# Altium PCB 屏幕.pcbdoc
Units mil, origin at the board's own origin, x right, y up, seen from the top; angles counter-clockwise.
Board outline 3286 x 2666.29 mil, 2 copper layers (Top Layer, Bottom Layer); 25 components, 28 nets, 116 pads, 38 vias.
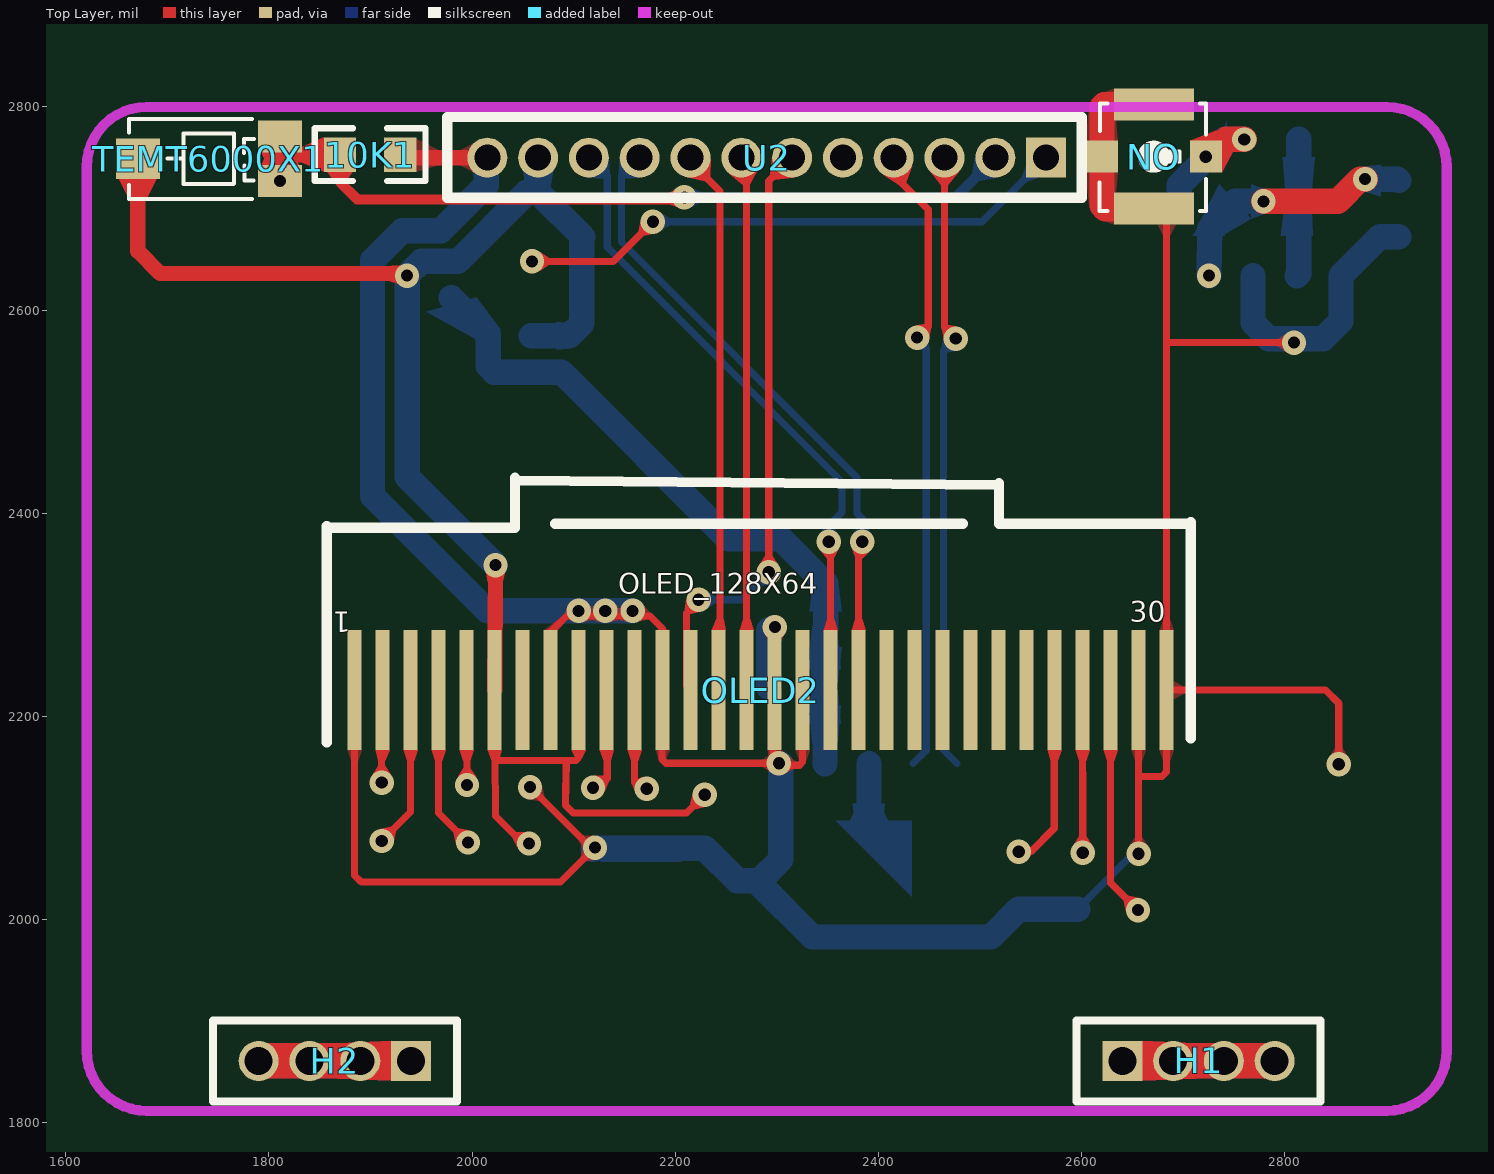
[diagram p0: Top Layer view]
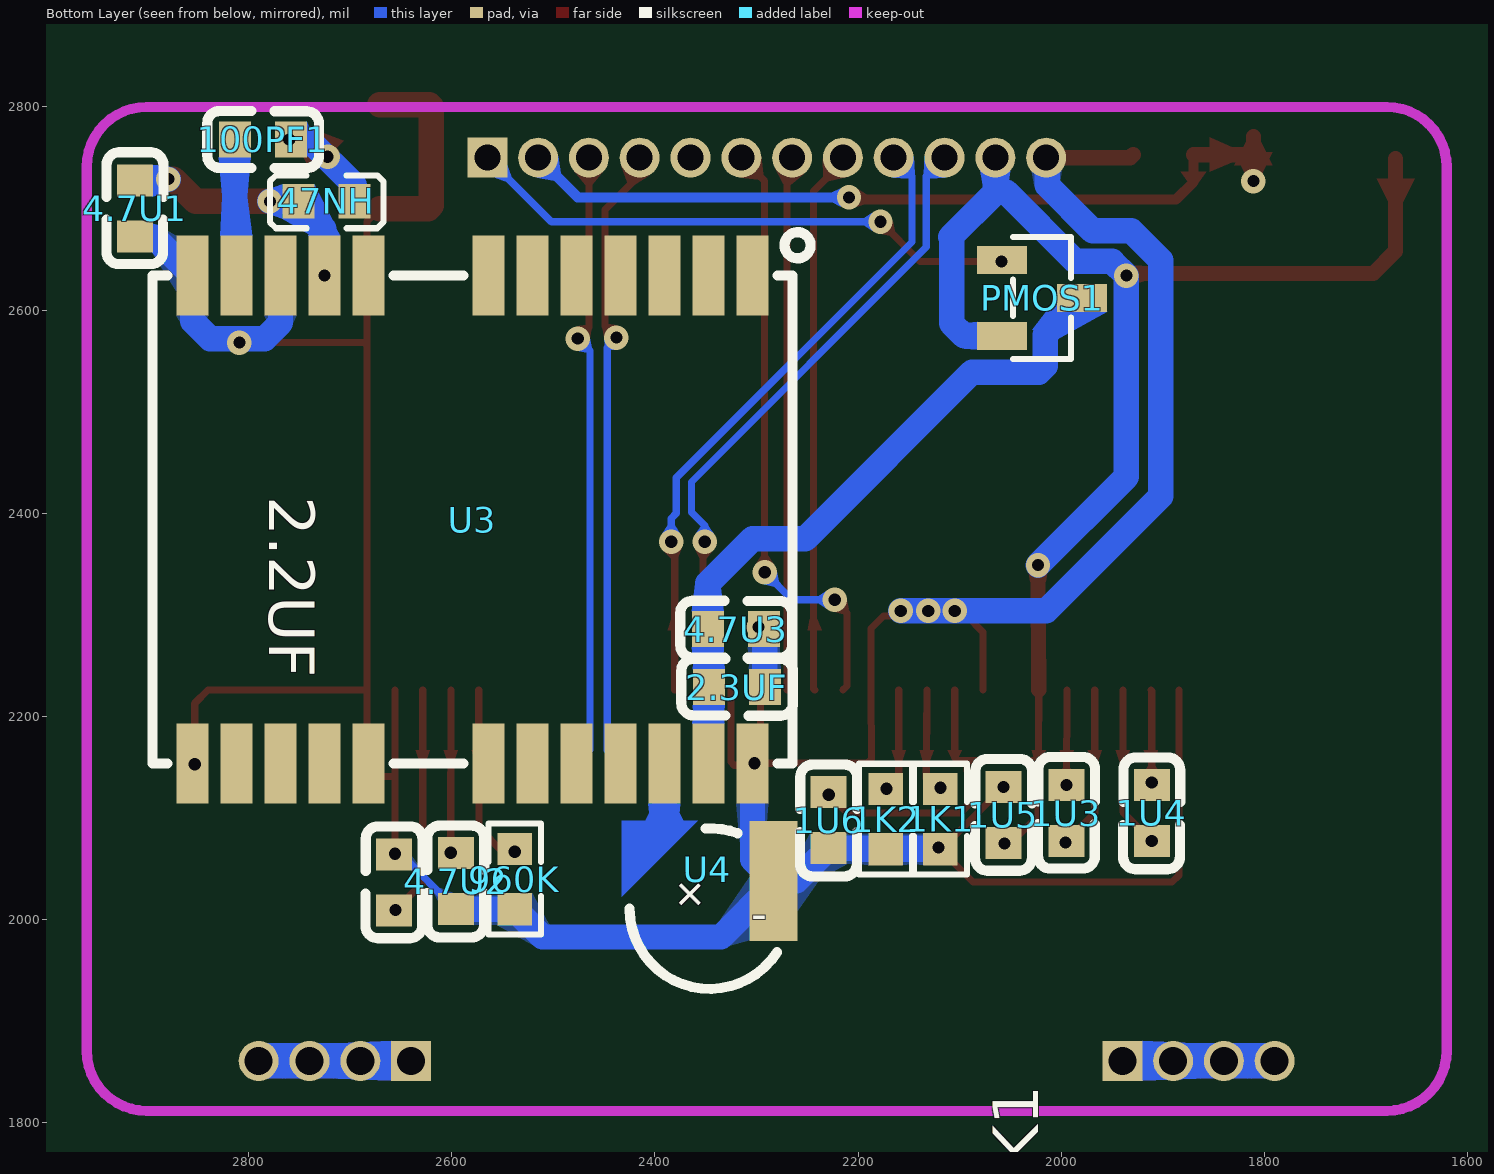
[diagram p1: Bottom Layer view, seen from below]

## Layer stack, top to bottom
Top Layer: signal copper (thickness not stored)
Dielectric: dielectric 12.6, FR-4, Dk 4.8
Bottom Layer: signal copper (thickness not stored)

## Board outline
4286,1000 1000,1000 1000,3666.29 4286,3666.29

## Components (designator, comment, footprint, x,y, rotation, side; value= is the part's Value field where it differs from the comment)
1K1 "1k" R0603#1 2119,2098.94 r270 bottom
1K2 "1k" R0603#1 2173,2098.94 r270 bottom
1U3 "1U" C0603 1995,2104.94 r90 bottom
1U4 "1u" C0603 1911,2104.94 r270 bottom
1U5 "1u" C0603 2057,2102.94 r90 bottom
1U6 "1U" C0603 2229,2097.94 r270 bottom
2.2UF "0.1u" C0603 2657,2036.5 r90 bottom
2.3UF "0.1u" C0603 2319.44,2228.94 r180 bottom
4.7U1 "0.1u" C0603 2912,2699.94 r90 bottom
4.7U2 "0.1u" C0603 2596,2037.94 r270 bottom
4.7U3 "0.1u" C0603 2320.44,2285.94 r180 bottom
10K1 "10K1" R0603#2 1899.66,2752.94 r180 top
47NH "1m" L0603 2723.45,2706.94 r180 bottom
100PF1 "100PF1" C0603 2786,2767.94 r180 bottom
960K "1k" R0603#1 2538,2039.94 r270 bottom
H1 "1.27mm1*4P" 1.27MM1*4P 2715,1860.94 r0 top
H2 "1.27mm1*4P" 1.27MM1*4P 1865,1860.94 r180 top
NO "IPEX-20279-001E" IPEX-SMD_4P-L2.6-W2.6-LS3.0 2671,2750.94 r90 top
OLED2 "0.96 OLED裸屏" OLED-12864-0.96-30PIN 2284,2225.94 r90 top
PMOS1 "SI2305" SOT-23-3_L2.9-W1.3-P1.90-LS2.4-BR 2019,2611.94 r180 bottom
TEMT6000X1 "TEMT6000X01" SENSORS-SMD_TEMT6000X01 1741,2748.94 r180 top
U2 "1.27mm 12pin" "1.27MM 12P" 2290,2749.94 r180 top
U3 "AIR551G" GPS-SMD_24P-L16.0-W12.2-P1.10 2579.64,2393.78 r270 bottom
U4 "SM3R3333 T01" BAT-SMD_SM3R3333-T01 2348.55,2049.12 r270 bottom
? "" ? 2196.29,2963.91 r0 top

## Footprints (in the part's own frame and the unit in brackets; to place one, negate y for a bottom-side part, rotate by r counter-clockwise, add the part's x,y. Pads: shape width x height; smd on the part's side, far side on the other; paste and mask are expansions set on the pad)
1.27MM1*4P [mm]
  rect 1x1 hole 0.7: 1(-1.905,0)
  round 1 hole 0.7: 2(-0.635,0) 3(0.635,0) 4(1.905,0)
  silkscreen extent -3.05,-1.02 3.05,1.02
"1.27MM 12P" [mm]
  rect 1x1 hole 0.65: 1(-6.985,0)
  round 1 hole 0.65: 2(-5.715,0) 3(-4.445,0) 4(-3.175,0) 5(-1.905,0) 6(-0.635,0) 7(0.635,0) 8(1.905,0) 9(3.175,0) 10(4.445,0) 11(5.715,0) 12(6.985,0)
  silkscreen extent -7.87,-1.02 7.98,1
BAT-SMD_SM3R3333-T01 [mm]
  rect 3x1.2 smd: 1(0.275,1.662)
  round 0 smd: 2(-0.275,-1.663)
  Top Layer region: -1.225,-2.138 0.675,-2.138 -1.225,-0.238
  silkscreen extent -1.03,-1.94 2.98,1.74
C0603 [mm]
  rect 0.8x0.9 smd: 1(0.7,0) 2(-0.7,0)
  silkscreen extent -1.39,-0.72 1.41,0.71
GPS-SMD_24P-L16.0-W12.2-P1.10 [mm]
  rect 2x0.8 smd: 1(-6.1,7) 2(-6.1,5.9) 3(-6.1,4.8) 4(-6.1,3.7) 5(-6.1,2.6) 6(-6.1,1.5) 7(-6.1,0.4) 8(-6.1,-2.6) 9(-6.1,-3.7) 10(-6.1,-4.8) 11(-6.1,-5.9) 12(-6.1,-7) 13(6.1,-7) 14(6.1,-5.9) 15(6.1,-4.8) 16(6.1,-3.7) 17(6.1,-2.6) 18(6.1,0.4) 19(6.1,1.5) 20(6.1,2.6) 21(6.1,3.7) 22(6.1,4.8) 23(6.1,5.9) 24(6.1,7)
  silkscreen extent -7.18,-8 6.1,8.45
IPEX-SMD_4P-L2.6-W2.6-LS3.0 [mm]
  rect 0.8x2 smd: 1(-1.3,0) 3(1.3,0)
  rect 0.8x0.8 smd: 2(0,1.3) 4(0,-1.3)
  silkscreen extent -1.36,-1.31 1.33,1.36
L0603 [mm]
  rect 0.8x0.864 smd: 1(0.7,0) 2(-0.7,0)
  silkscreen extent -1.41,-0.67 1.42,0.65
OLED-12864-0.96-30PIN [mm]
  rect 3x0.351 smd: 1(0.002,10.15) 2(0,9.45) 3(0,8.75) 4(0,8.05) 5(0,7.35) 6(0,6.65) 7(0,5.95) 8(0,5.25) 9(0,4.55) 10(0,3.85) 11(0,3.15) 12(0,2.45) 13(0,1.75) 14(0,1.05) 15(0,0.35) 16(0,-0.35) 17(0,-1.05) 18(0,-1.75) 19(0,-2.45) 20(0,-3.15) 21(0,-3.85) 22(0,-4.55) 23(0,-5.25) 24(0,-5.95) 25(0,-6.65) 26(0,-7.35) 27(0,-8.05) 28(-0.001,-8.75) 29(-0.002,-9.45) 30(-0.002,-10.15)
  silkscreen extent -1.3,-10.76 5.32,10.85
R0603#1 [mil]
  rect 31.75x34.02 smd: 1(29.66,0) 2(-29.65,0)
  silkscreen extent -55,-26 55,26
R0603#2 [mil]
  rect 31.75x34.02 smd: 1(-29.65,0) 2(29.65,0)
  silkscreen extent -55,-26 55,26
SENSORS-SMD_TEMT6000X01 [mil]
  rect 43.3x31.5 smd: 1(-70,22) 2(-70,-22)
  rect 43.3x39.4 smd: 3(70,0)
  silkscreen extent -79,-39 79,39
SOT-23-3_L2.9-W1.3-P1.90-LS2.4-BR [mm]
  rect 1.25x0.7 smd: 1(-1,0.95) 2(-1,-0.95) 3(1,0)
  silkscreen extent -0.73,-1.53 0.73,1.53
? [mil]

## Via types
v1: diameter 24, hole 12, Top Layer to Bottom Layer, tented both sides, 38 vias

## Nets (pads, with @x,y where several pads share a name; then routed paths per layer and width w, separated by ;. In a path a pad name is that pad's centre, name@x,y a point inside that pad or via, vN(x,y) a via of type N, cw(c..) or ccw(c..) an arc to the next point about the centre after c; other vN are vias at no path point)
1U3_1: 1U3.1 OLED2.5 | length 93.4
  Top Layer w7: OLED2.5@1994.6,2225.94 v1(1995,2132.5)
1U3_2: 1U3.2 OLED2.4 | length 162
  Top Layer w7: OLED2.4@1967.1,2225.94 1967.1,2104.84 v1(1996,2075.94)
1U4_1: 1U4.1 OLED2.3 | length 160.4
  Top Layer w7: v1@1911,2077.34 1939.5,2105.94 OLED2.3@1939.5,2225.94
  other v1: 1911,2077.38
1U4_2: 1U4.2 OLED2.2 | length 91.4
  Top Layer w7: v1(1911,2134.94) 1911,2225.04 OLED2.2@1911.9,2225.94
960K_2: 960K.2 OLED2.26 | length 180.5
  Top Layer w7: v1(2538,2066.94) 2550,2066.94 2573,2089.94 OLED2.26@2573.4,2225.94
BDSEN: PMOS1.1 U2.1 | length 548.3
  Top Layer w7: v1(2059,2647.94) 2139,2647.94 v1(2178,2686.94)
  Bottom Layer w7: v1(2178,2686.94) 2502,2686.94 U2.1
CS: OLED2.13 U2.6 | length 593.1
  Top Layer w7: OLED2.13@2215.1,2225.94 2211,2230.04 2211,2301.94 v1(2223,2314.94) ; v1(2292,2341.94) 2292,2726.94 U2.6
  Bottom Layer w7: v1(2223,2314.94) 2265,2314.94 v1(2292,2341.94)
D/C: OLED2.15 U2.7 | length 526.2
  Top Layer w7: U2.7 2270.2,2744.74 OLED2.15@2270.2,2225.94
GND: 1K1.1 1K2.1 1U5.1 1U6.1 2.2UF.1 2.3UF.1 4.7U1.2 4.7U2.1 4.7U3.1 10K1.1 960K.1 NO.1 NO.2 NO.3 OLED2.1 OLED2.8 OLED2.12 OLED2.16 OLED2.17 OLED2.29 OLED2.30 U2.12 U3.10 U3.12 U3.13 U3.24 U4.1 | length 4616.1
  Top Layer w7: OLED2.1 1884.4,2043.54 1891,2036.94 2087,2036.94 v1(2121,2070.94) 2116.56,2070.94 v1(2057,2130.5) ; OLED2.8@2077.3,2225.94 2077.3,2283.24 2093,2298.94 2175,2298.94 2187.5,2286.44 2187.5,2225.94 2187,2157.94 2191,2153.94 v1(2302,2153.94) ; OLED2.16@2297.8,2225.94 2296,2224.14 2296,2159.94 v1(2302,2153.94) ; v1@2305,2153.94 v1(2302,2153.94) ; OLED2.17@2325.3,2225.94 2325.3,2155.24 2322,2151.94 2304,2151.94 v1(2302,2153.94) ; v1(2656,2064.94) OLED2.29 ; 2656,2140.74 2679,2140.94 2683.6,2145.54 OLED2.30 ; NO.1@2671,2699.74 2683.6,2687.14 OLED2.30 ; 2683.61,2565.53 2686.02,2567.94 v1(2809,2567.94) ; v1(2853,2152.94) 2853,2212.94 2840,2225.94 OLED2.30
  Top Layer w10: OLED2.16@2297.8,2225.94 v1(2298,2287.94)
  Top Layer w15: 10K1.1 1932.3,2749.94 U2.12
  Top Layer w25: NO.1@2671,2699.74 2623.2,2699.74 2620,2702.94 2620,2799.94 2622,2801.94 NO.3
  Bottom Layer w7: 1K1.1@2119,2069.24 2127.9,2060.34 2204.4,2060.34 ; 960K.1@2538,2010.24 2596,2010.34 2649.7,2064.04 2.2UF.1@2657,2064.04
  Bottom Layer w15: U4.1 2304,2059.24 U3.24@2304,2153.64
  Bottom Layer w25: U2.12 2014,2748.94 2014,2722.94 1969.07,2678.01 1931.07,2678.01 1902,2648.94 1902,2416.94 2015,2303.94 2104.85,2303.94 v1(2131,2303.94) v1(2158,2303.94) ; 1K1.1@2119,2069.24 2120.1,2070.34 2229,2070.34 2261.1,2038.34 U4.1 ; 2.3UF.1 2291.9,2284.94 4.7U3.1 ; U3.24@2304,2153.64 2304,2059.24 U4.1 ; 4.7U2.1@2596,2010.34 2538,2010.24 2510.7,1982.94 2335,1982.94 2283.1,2034.84 U4.1 ; U3.10 2768.6,2587.34 2784,2571.94 2838,2571.94 2855.2,2589.14 U3.12 2893.7,2672.34 4.7U1.2@2912,2672.34
  other v1: 2104.85,2303.94
H1_1: H1.1 H1.2 H1.3 H1.4 | length 300
  Top Layer w35: H1.1 H1.4
  Bottom Layer w35: H1.1 H1.4
H2_1: H2.1 H2.2 H2.3 H2.4 | length 300
  Top Layer w35: H2.4 H2.1
  Bottom Layer w35: H2.4 H2.1
LIGHTADC: 10K1.2 TEMT6000X1.1 TEMT6000X1.2 U2.2 | length 799.7
  Top Layer w10: 10K1.2 1870,2725.94 1887,2708.94 2207,2708.94 v1(2209,2710.94)
  Top Layer w15: v1(1811,2726.94) TEMT6000X1.2 ; 1811,2751.34 1812.6,2752.94 10K1.2
  Bottom Layer w10: v1(2209,2710.94) 2476,2710.94 U2.2
MOSI: OLED2.19 U2.9 | length 631.1
  Top Layer w7: OLED2.19@2380.5,2225.94 2380.5,2368.44 v1(2384,2371.94)
  Bottom Layer w7: U2.9 2147,2731.94 2147,2666.94 2379,2434.94 2379,2399.94 2384,2394.94 v1(2384,2371.94)
NO_4: 47NH.1 100PF1.1 NO.4 | length 141.9
  Top Layer w25: NO.4 2725,2750.94 2742,2767.94 v1(2760,2767.94)
  Bottom Layer w25: 47NH.1 2695.9,2722.84 2741,2767.94 100PF1.1
  other v1: 2722.18,2750.95
OLED2_10: 1K1.2 OLED2.10 | length 104.7
  Top Layer w7: v1(2119,2129.94) 2124,2129.94 2133,2138.94 OLED2.10@2132.4,2225.94
OLED2_11: 1K2.2 OLED2.11 | length 105.5
  Top Layer w7: OLED2.11@2160,2225.94 2160,2134.94 2166,2128.94 v1(2172,2128.94)
OLED2_27: 4.7U2.2 OLED2.27 | length 160
  Top Layer w7: OLED2.27@2600.9,2225.94 v1(2601,2065.94)
OLED2_28: 2.2UF.2 OLED2.28 | length 227.7
  Top Layer w7: OLED2.28 2628.5,2036.34 v1@2655.4,2009.34
  other v1: 2655.44,2009.38
RES: OLED2.14 U2.8 | length 536.5
  Top Layer w7: U2.8 2215,2745.94 2244,2716.94 2244,2227.34 OLED2.14@2242.7,2225.94
RXD: U2.3 U3.20 | length 612.3
  Top Layer w7: U2.3 2465,2582.94 v1(2476,2571.94)
  Bottom Layer w7: v1@2477,2571.94 v1(2476,2571.94) 2464,2559.94 2464,2166.94 U3.20
S$18468: 
SCLK: OLED2.18 U2.10 | length 633.3
  Top Layer w7: v1(2351,2371.94) 2352.9,2370.04 OLED2.18@2352.9,2225.94
  Bottom Layer w7: U2.10 2133,2731.94 2133,2668.94 2133,2661.94 2364,2430.94 2364,2400.94 2351,2387.94 v1(2351,2371.94)
TXD: U2.4 U3.21 | length 623.8
  Top Layer w7: U2.4 2415,2732.94 2449,2698.94 2449,2583.94 v1(2438,2572.94)
  Bottom Layer w7: U3.21 2447,2166.64 2447,2562.94 v1(2438,2572.94)
U3_9: 4.7U1.1 47NH.2 U3.9 | length 254
  Top Layer w25: v1(2779,2706.94) 2852,2706.94 2874,2728.94 v1(2879,2728.94)
  Bottom Layer w25: v1(2725.31,2633.94) 2726.1,2680.04 2751,2704.94 47NH.2 v1(2779,2706.94) ; v1(2879,2728.94) 2910.6,2728.94 4.7U1.1
U3_11: 100PF1.2 U3.11 | length 134.7
  Bottom Layer w25: U3.11 2813.6,2635.54 100PF1.2
U3_22: U3.22 U4.2 | length 206.7
  Bottom Layer w15: U3.22 2390.7,2083.24 U4.2
  Bottom Layer w25: U3.22 2390.7,2083.24 U4.2
U3_23: 2.3UF.2 4.7U3.2 PMOS1.3 U3.23 | length 680
  Bottom Layer w25: PMOS1.3 2016,2575.54 2016,2544.94 2022,2538.94 2088,2538.94 2252,2374.94 2304,2374.94 2348,2330.94 4.7U3.2 ; 4.7U3.2@2347,2285.94 2.3UF.2 U3.23
VCC: 1U5.2 1U6.2 OLED2.6 OLED2.9 PMOS1.2 TEMT6000X1.3 U2.11 | length 1721.1
  Top Layer w7: OLED2.6@2022.2,2225.94 2023,2101.94 2050,2074.94 v1(2056,2074.94) ; 2022.6,2156.64 2102,2156.64 2104.9,2159.44 OLED2.9@2104.9,2225.94 ; 2092.7,2156.64 2092,2112.54 2099.6,2104.94 2211,2104.94 v1(2229,2122.94) v1@2229,2124.94
  Top Layer w15: TEMT6000X1.3 1671,2657.94 1693,2635.94 1934,2635.94 v1(1936,2633.94) ; OLED2.6@2022.2,2225.94 v1(2023,2348.94)
  Bottom Layer w25: v1(2023,2348.94) 1936,2435.94 v1(1936,2633.94) 1950,2647.94 1986,2647.94 2054,2715.94 2065,2715.94 ; PMOS1.2 2095.6,2574.54 2108,2586.94 2108,2670.94 2109,2671.94 2065,2715.94 ; U2.11 2065,2715.94
pads on no net: OLED2.7 OLED2.20 OLED2.21 OLED2.22 OLED2.23 OLED2.24 OLED2.25 U2.5 U3.1 U3.2 U3.3 U3.4 U3.5 U3.6 U3.7 U3.8 U3.14 U3.15 U3.16 U3.17 U3.18 U3.19

## Polygon pours and split planes (outlines as drawn)
GND on Top Layer (solid): 1505,2877.94 3058,2877.94 3058,1735.94 1510,1735.94 1510,1774.94
GND on Bottom Layer (solid): 1500,2874.94 3055,2874.94 3055,1737.94 1508,1737.94 1508,1748.94

## Keep-outs
Keep-Out Layer:
  lines w10: 1620.71,1870.9 ccw(c1679.77,1870.9) 1679.77,1811.85 ; 1620.71,2740.98 cw(c1679.77,2740.98) 1679.77,2800.03 ; 2900.24,1811.85 ccw(c2900.24,1870.9) 2959.29,1870.9 ; 2900.24,2800.03 cw(c2900.24,2740.98) 2959.29,2740.98

## Other copper
Top Layer:
  region net H2_1: 1920.32,1841.25 1920.32,1880.63 1867.82,1878.44 1867.82,1843.44
  region net H1_1: 2659.68,1880.63 2659.68,1841.25 2712.18,1843.44 2712.18,1878.44
  region net 1U4_2: 1905.05,2166.89 1918.85,2166.89 1914.5,2156.39 1907.5,2156.39
  region net 1U4_1: 1932.61,2166.89 1946.41,2166.89 1943.01,2156.39 1936.01,2156.39
  region net 1U3_2: 1960.17,2166.89 1973.97,2166.89 1970.57,2156.39 1963.57,2156.39
  region net 1U3_1: 1987.73,2166.89 2001.53,2166.89 1998.41,2156.39 1991.41,2156.39
  region net VCC: 2015.29,2166.89 2029.09,2166.89 2026.14,2156.39 2019.14,2156.39
  region net VCC: 2097.96,2166.89 2111.77,2166.89 2108.37,2159.48 2101.37,2159.48
  region net OLED2_10: 2125.53,2166.89 2139.33,2166.89 2136.38,2156.39 2129.38,2156.39
  region net OLED2_11: 2153.09,2166.89 2166.88,2166.89 2163.5,2156.39 2156.5,2156.39
  region net RES: 2249.56,2285 2235.76,2285 2240.5,2295.5 2247.5,2295.5
  region net D/C: 2277.12,2285 2263.32,2285 2266.72,2295.5 2273.72,2295.5
  region net SCLK: 2359.79,2285 2346,2285 2349.4,2295.5 2356.4,2295.5
  region net MOSI: 2387.36,2285 2373.55,2285 2376.96,2295.5 2383.96,2295.5
  region net 960K_2: 2566.47,2166.89 2580.27,2166.89 2576.68,2156.39 2569.68,2156.39
  region net OLED2_27: 2594.03,2166.89 2607.83,2166.89 2604.46,2156.39 2597.46,2156.39
  region net OLED2_28: 2621.59,2166.84 2635.39,2166.84 2631.99,2156.34 2624.99,2156.34
  region net NO_4: 2706.43,2766.69 2737.92,2735.2 2750.84,2759.1 2733.16,2776.78
  region net LIGHTADC: 1829.75,2755.19 1792.25,2755.19 1803.5,2732.69 1818.5,2732.69
  region net LIGHTADC: 1792.25,2742.69 1829.75,2742.69 1818.5,2765.19 1803.5,2765.19
  region net VCC: 1689.75,2729.24 1652.25,2729.24 1663.5,2706.74 1678.5,2706.74
  region net LIGHTADC: 1854.13,2735.93 1854.13,2769.95 1831.63,2760.44 1831.63,2745.44
  region net LIGHTADC: 1882.5,2735.93 1857.5,2735.93 1865,2725.95 1875,2725.95
  region net LIGHTADC: 2202.22,2701.04 2200.02,2718.9 2192.17,2713.94 2193.4,2703.94
  region net LIGHTADC: 1802,2734.88 1820,2734.88 1818.5,2743.28 1803.5,2743.28
  region net VCC: 1929.22,2643.84 1927.02,2625.98 1918.86,2628.44 1920.71,2643.44
  region net BDSEN: 2066.94,2638.94 2066.94,2656.94 2075.34,2651.44 2075.34,2644.44
  region net BDSEN: 2178.75,2674.96 2166.02,2687.69 2163.97,2677.86 2168.92,2672.91
  region net VCC: 2031.95,2340.94 2013.95,2341.06 2015.39,2332.65 2030.39,2332.55
  region net VCC: 2229.75,2110.96 2217.02,2123.69 2214.97,2113.86 2219.92,2108.91
  region net SCLK: 2360.86,2365.1 2342.98,2363.01 2349.4,2355.3 2356.4,2356.12
  region net MOSI: 2391.07,2362.24 2373.49,2366.14 2376.96,2356.77 2383.96,2355.22
  region net CS: 2224.23,2303 2211,2315.21 2209.35,2305.31 2214.49,2300.56
  region net CS: 2283,2349.88 2301,2349.88 2295.5,2358.28 2288.5,2358.28
  region net 960K_2: 2545.94,2057.94 2545.94,2075.94 2550,2070.44 2550,2063.44
  region net OLED2_27: 2610,2073.88 2592,2073.87 2597.49,2082.28 2604.49,2082.28
  region net VCC: 2053.62,2086.7 2044.63,2071.1 2040.04,2079.95 2043.65,2086.23
  region net OLED2_11: 2168.93,2140.54 2160.88,2124.44 2158.35,2131.64 2161.65,2138.24
  region net OLED2_10: 2130.53,2126.61 2120.86,2141.79 2130.85,2141.74 2134.7,2135.7
  region net OLED2_28: 2656.19,2021.36 2643.46,2008.63 2641.41,2018.46 2646.36,2023.41
  region net 1U3_2: 1996.75,2087.92 1984.02,2075.19 1981.97,2085.02 1986.92,2089.97
  region net 1U3_1: 2003.97,2140.47 1985.97,2140.4 1991.44,2148.82 1998.44,2148.85
  region net 1U4_1: 1922.98,2076.63 1910.25,2089.36 1920.08,2091.41 1925.03,2086.46
  region net 1U4_2: 1902,2142.88 1920,2142.88 1914.5,2151.28 1907.5,2151.28
  region net RXD: 2476.75,2583.92 2464.02,2571.19 2462.53,2580.47 2467.47,2585.42
  region net TXD: 2449.97,2572.19 2437.25,2584.92 2446.52,2586.42 2451.47,2581.47
  region net H2_1: 1803.02,1846.18 1803.02,1875.7 1816.8,1878.44 1816.8,1843.44
  region net H2_1: 1876.98,1846.18 1876.98,1875.7 1863.2,1878.44 1863.2,1843.44
  region net H2_1: 1903.02,1846.18 1903.02,1875.7 1916.8,1878.44 1916.8,1843.44
  region net H2_1: 1826.98,1846.18 1826.98,1875.7 1813.2,1878.44 1813.2,1843.44
  region net H2_1: 1853.02,1846.18 1853.02,1875.7 1866.8,1878.44 1866.8,1843.44
  region net H1_1: 2776.98,1846.18 2776.98,1875.7 2763.2,1878.44 2763.2,1843.44
  region net H1_1: 2676.98,1846.18 2676.98,1875.7 2663.2,1878.44 2663.2,1843.44
  region net H1_1: 2703.02,1846.18 2703.02,1875.7 2716.8,1878.44 2716.8,1843.44
  region net H1_1: 2726.98,1846.18 2726.98,1875.7 2713.2,1878.44 2713.2,1843.44
  region net H1_1: 2753.02,1846.18 2753.02,1875.7 2766.8,1878.44 2766.8,1843.44
  region net RES: 2211.7,2730.53 2234.67,2749.09 2234.58,2731.31 2229.11,2726.88
  region net D/C: 2253.05,2734.29 2282.02,2740.04 2273.72,2724.35 2266.72,2722.96
  region net CS: 2295.35,2751.17 2316.23,2730.29 2298.52,2728.51 2293.57,2733.46
  region net TXD: 2405.09,2732.93 2433.11,2742.23 2427.15,2725.73 2419.72,2723.27
  region net RXD: 2479.76,2736.92 2450.24,2736.92 2461.5,2723.14 2468.5,2723.14
Bottom Layer:
  region net U3_22: 2371.92,2097.34 2409.42,2097.34 2398.17,2119.84 2383.17,2119.84
  region net H2_1: 1920.32,1841.25 1920.32,1880.63 1867.82,1878.44 1867.82,1843.44
  region net H1_1: 2659.68,1880.63 2659.68,1841.25 2712.18,1843.44 2712.18,1878.44
  region net BDSEN: 2557.69,2730.25 2545.32,2742.63 2541.61,2731.49 2546.55,2726.54
  region net U3_23: 2362.75,2246.66 2331.25,2246.66 2334.5,2284.16 2359.5,2284.16
  region net U3_23: 2331.25,2211.22 2362.75,2211.22 2359.76,2173.72 2334.76,2173.72
  region net U3_23: 2363.11,2193 2331.61,2193 2334.5,2228.88 2359.5,2228.94
  region net U3_22: 2374.92,2114.26 2406.42,2114.26 2398.17,2091.76 2383.17,2091.76
  region net U3_22: 2374.92,2114.26 2406.42,2114.26 2403.17,2083.27 2378.17,2083.27
  region net U3_11: 2827.67,2673.31 2796.17,2673.31 2801.06,2710.81 2826.06,2710.81
  region net U3_9: 2741.06,2673.31 2709.56,2673.31 2713.6,2680.04 2738.6,2679.82
  region net U3_23: 2004.24,2612.76 1955.02,2598.16 2001.16,2572.73 2028.43,2580.82
  region net VCC: 2082.97,2560.76 2082.97,2588.32 2095.6,2587.04 2095.6,2562.04
  region net NO_4: 2742.7,2785.66 2742.7,2750.22 2741,2755.44 2741,2780.44
  region net U3_11: 2797.81,2750.22 2829.31,2750.22 2826.06,2712.72 2801.06,2712.72
  region net U3_23: 2363.75,2303.66 2332.25,2303.66 2335.5,2330.94 2360.5,2330.94
  region net U3_23: 2332.25,2268.22 2363.75,2268.22 2359.5,2230.72 2334.5,2230.72
  region net U3_9: 2894.28,2743.25 2894.28,2711.75 2879,2716.44 2879,2741.44
  region net U3_9: 2766.75,2689.93 2735.25,2723.94 2717.6,2689.22 2734.94,2671.2
  region net U3_9: 2766.75,2689.93 2766.75,2723.94 2779,2719.44 2779,2694.44
  region net LIGHTADC: 2216.94,2701.94 2216.94,2719.94 2225.34,2715.94 2225.34,2705.94
  region net BDSEN: 2185.94,2677.94 2185.94,2695.94 2194.34,2690.44 2194.34,2683.44
  region net SCLK: 2342,2379.88 2360,2379.88 2354.5,2387.94 2347.5,2387.94
  region net MOSI: 2375,2379.88 2393,2379.88 2387.5,2388.28 2380.5,2388.28
  region net CS: 2230.94,2305.94 2230.94,2323.94 2239.34,2318.44 2239.34,2311.44
  region net CS: 2292.75,2329.96 2280.03,2342.69 2277.97,2332.86 2282.92,2327.91
  region net RXD: 2476.75,2559.96 2464.02,2572.69 2461.97,2562.86 2466.92,2557.91
  region net TXD: 2450,2573.06 2436.62,2561.02 2444.4,2560.6 2449.6,2565.28
  region net H2_1: 1803.02,1846.18 1803.02,1875.7 1816.8,1878.44 1816.8,1843.44
  region net H2_1: 1876.98,1846.18 1876.98,1875.7 1863.2,1878.44 1863.2,1843.44
  region net H2_1: 1903.02,1846.18 1903.02,1875.7 1916.8,1878.44 1916.8,1843.44
  region net H2_1: 1826.98,1846.18 1826.98,1875.7 1813.2,1878.44 1813.2,1843.44
  region net H2_1: 1853.02,1846.18 1853.02,1875.7 1866.8,1878.44 1866.8,1843.44
  region net H1_1: 2776.98,1846.18 2776.98,1875.7 2763.2,1878.44 2763.2,1843.44
  region net H1_1: 2676.98,1846.18 2676.98,1875.7 2663.2,1878.44 2663.2,1843.44
  region net H1_1: 2703.02,1846.18 2703.02,1875.7 2716.8,1878.44 2716.8,1843.44
  region net H1_1: 2726.98,1846.18 2726.98,1875.7 2713.2,1878.44 2713.2,1843.44
  region net H1_1: 2753.02,1846.18 2753.02,1875.7 2766.8,1878.44 2766.8,1843.44
  region net VCC: 2079.76,2736.92 2050.24,2736.92 2052.5,2723.14 2077.5,2723.14
  region net SCLK: 2113.77,2730.29 2134.65,2751.17 2135.47,2734.42 2130.52,2729.47
  region net MOSI: 2145.35,2751.17 2166.23,2730.29 2149.48,2729.47 2144.53,2734.42
  region net LIGHTADC: 2495.35,2751.17 2516.23,2730.29 2499.59,2727.45 2492.51,2734.52

## Text inside footprints (layer, text, board x,y; h text height)
OLED2: Top Overlay "1" at 1880.46,2302.87 h20 r180; Top Overlay "30" at 2647.39,2293.1 h20; Top Overlay "OLED_128X64" at 2144.01,2320.96 h20
U4: Bottom Overlay "+" at 2368.91,2002.54 h31.5 r315; Bottom Overlay "-" at 2305.24,1990.06 h31.5